# Altium PCB Small_BMS.PcbDoc
Units mil, origin at the board's own origin, x right, y up, seen from the top; angles counter-clockwise.
Board outline 1490 x 885 mil, 4 copper layers (Top Layer, Layer 1, Layer 2, Bottom Layer), stack 23.756 mil thick; 58 components, 45 nets, 233 pads, 19 vias.
Unrouted connection lines stored in the file: 3.
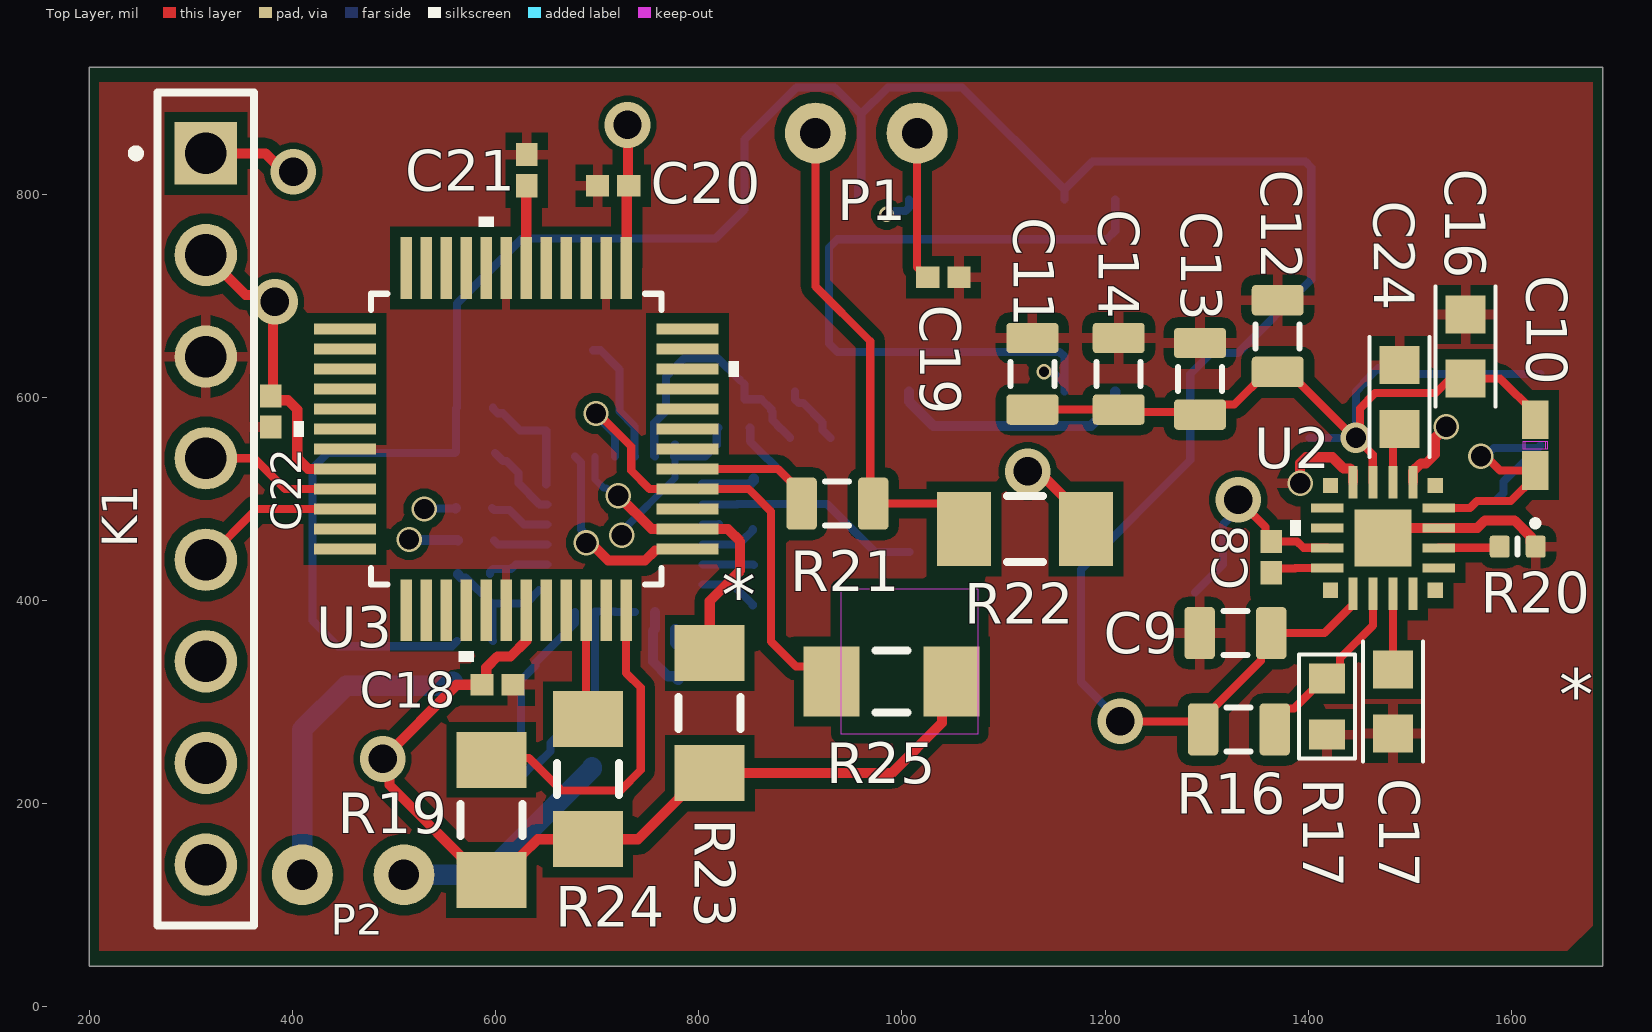
[diagram p0: Top Layer view]
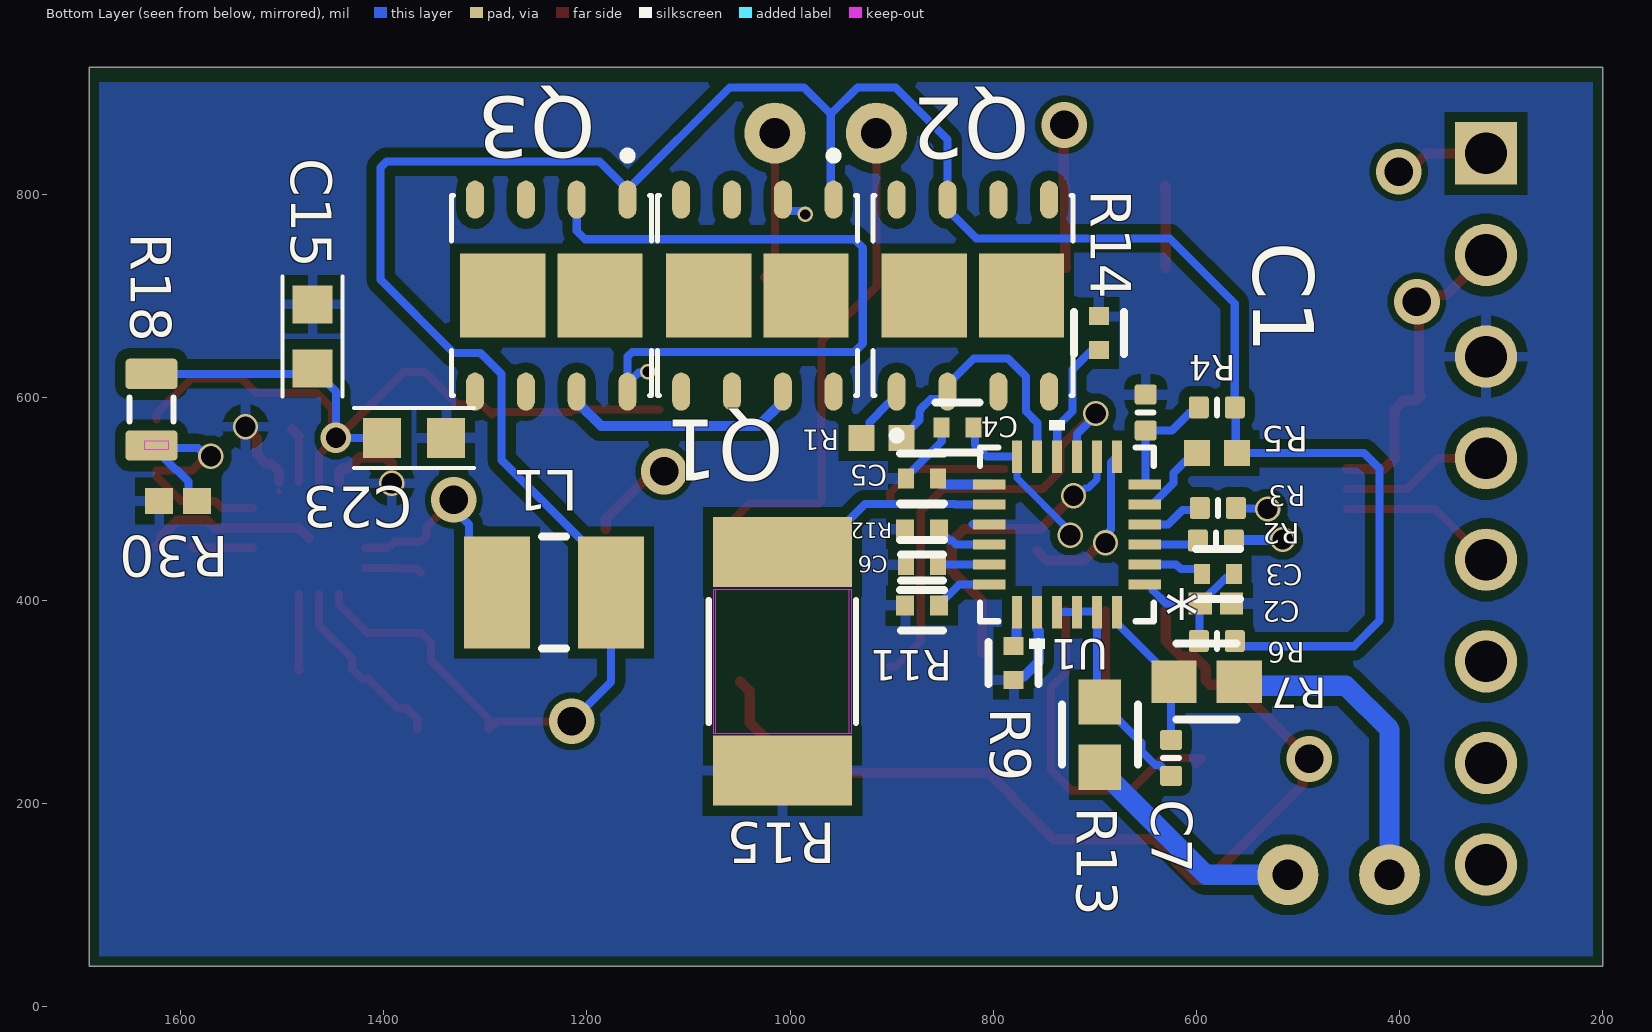
[diagram p1: Bottom Layer view, seen from below]
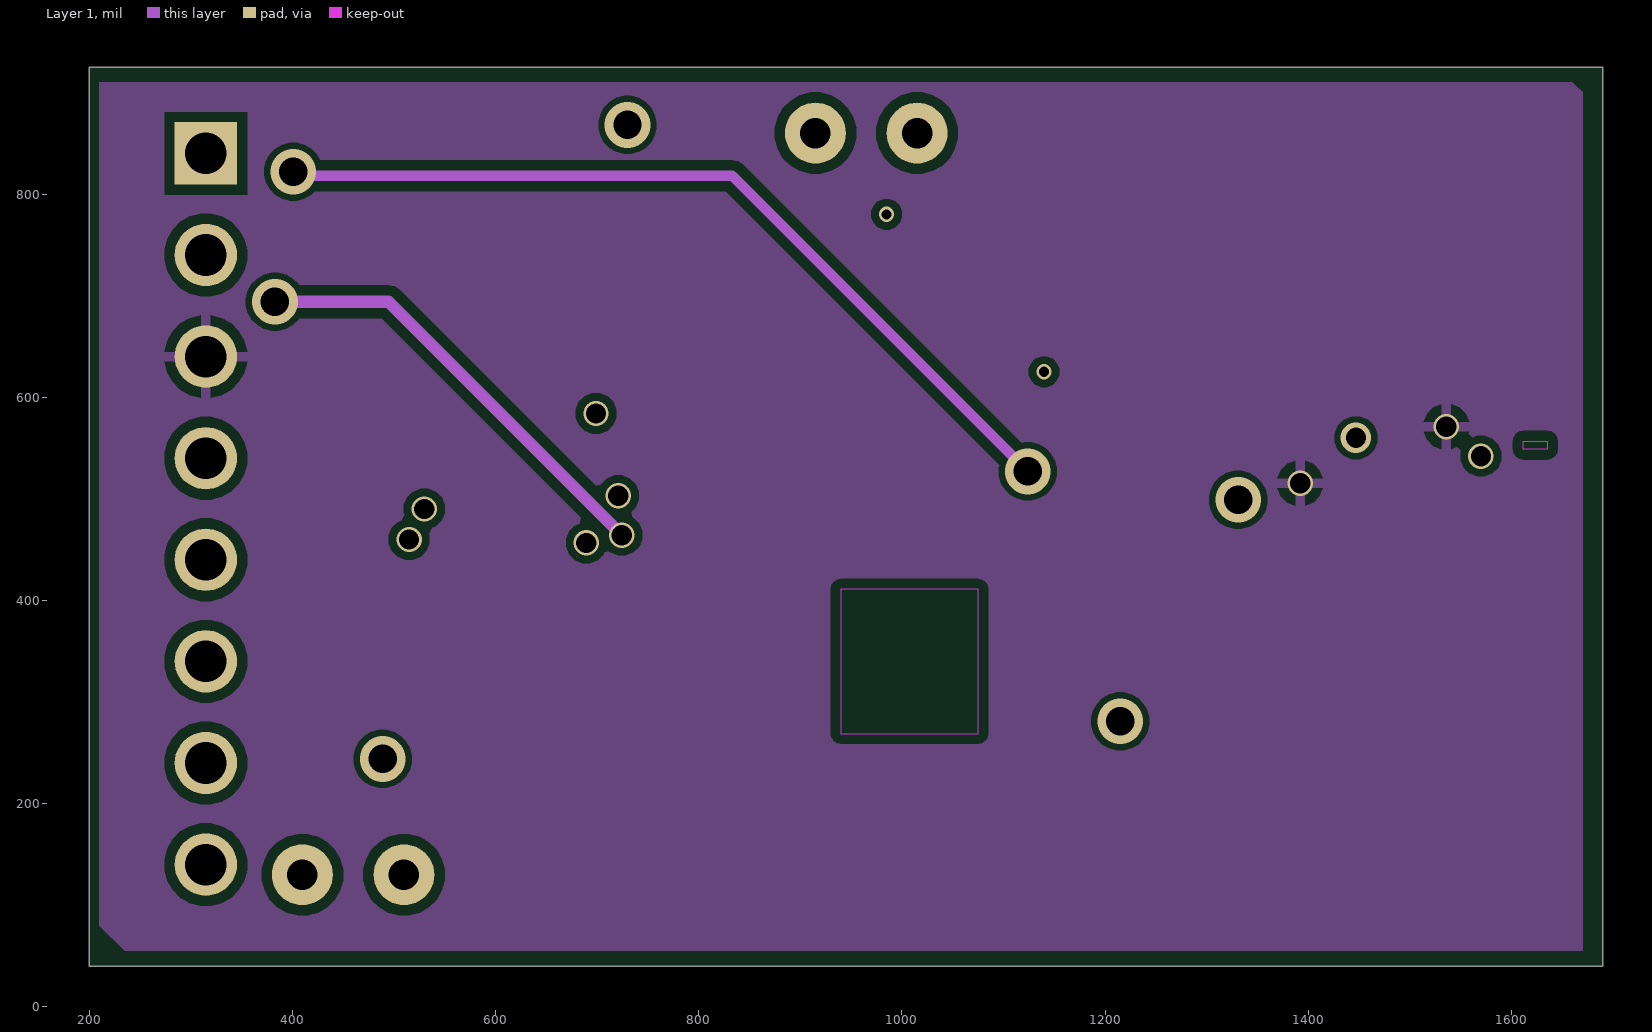
[diagram p2: Layer 1]
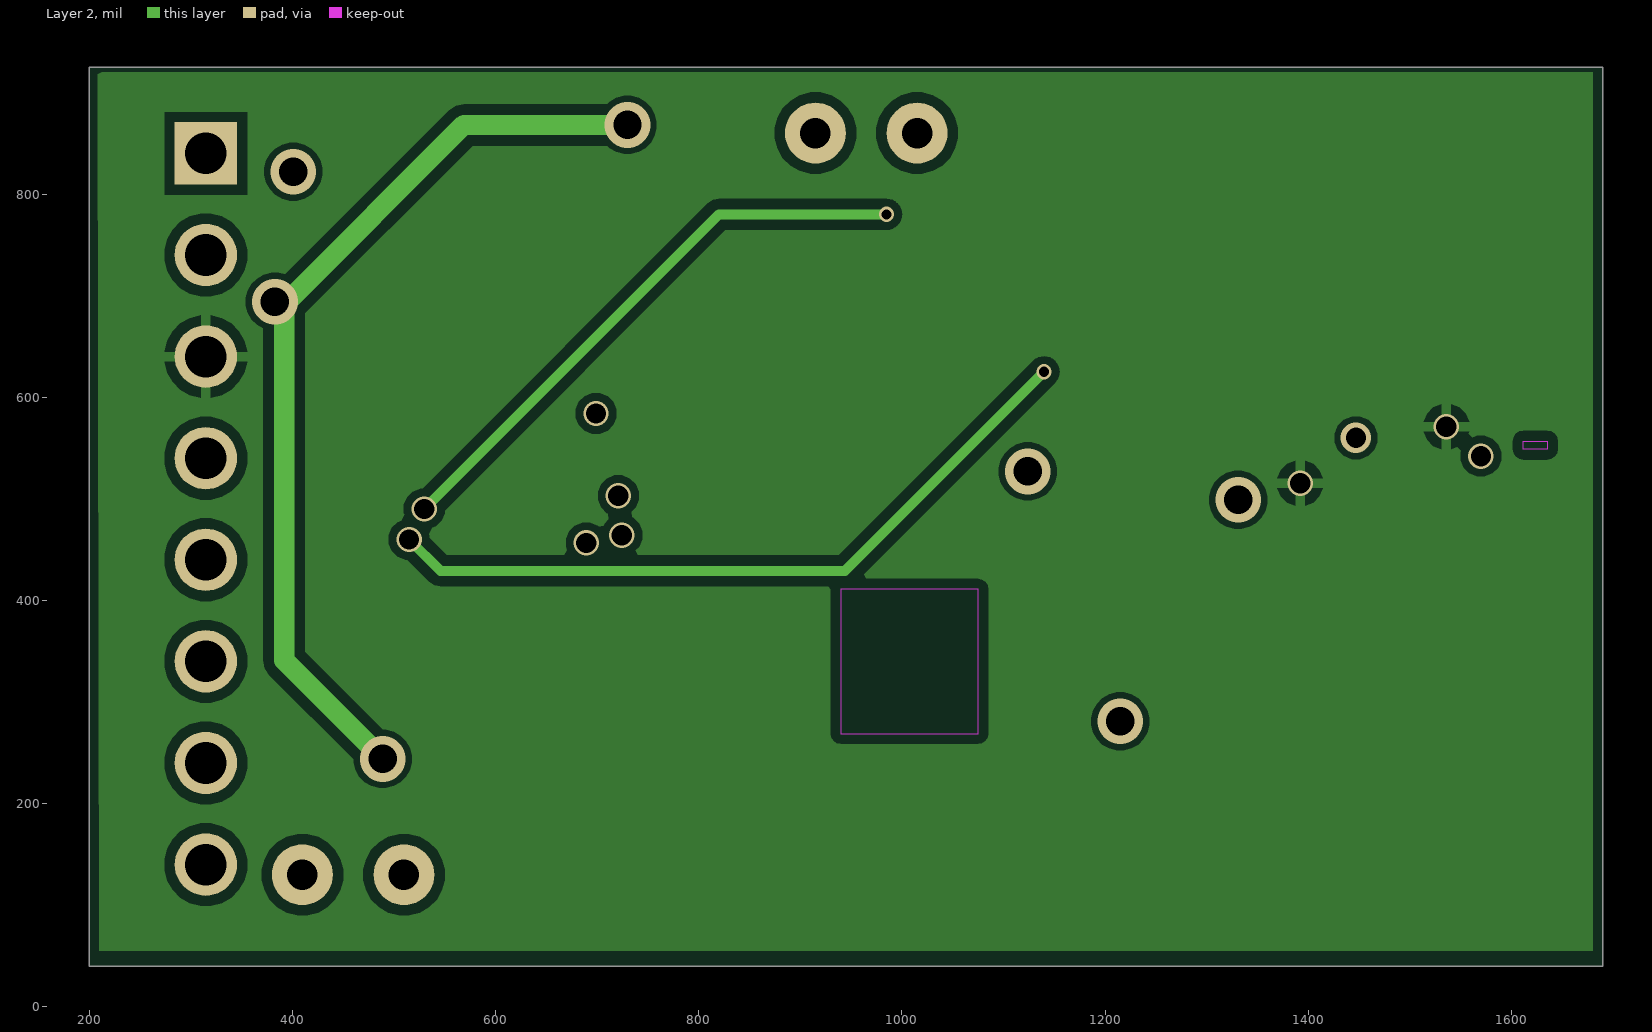
[diagram p3: Layer 2]
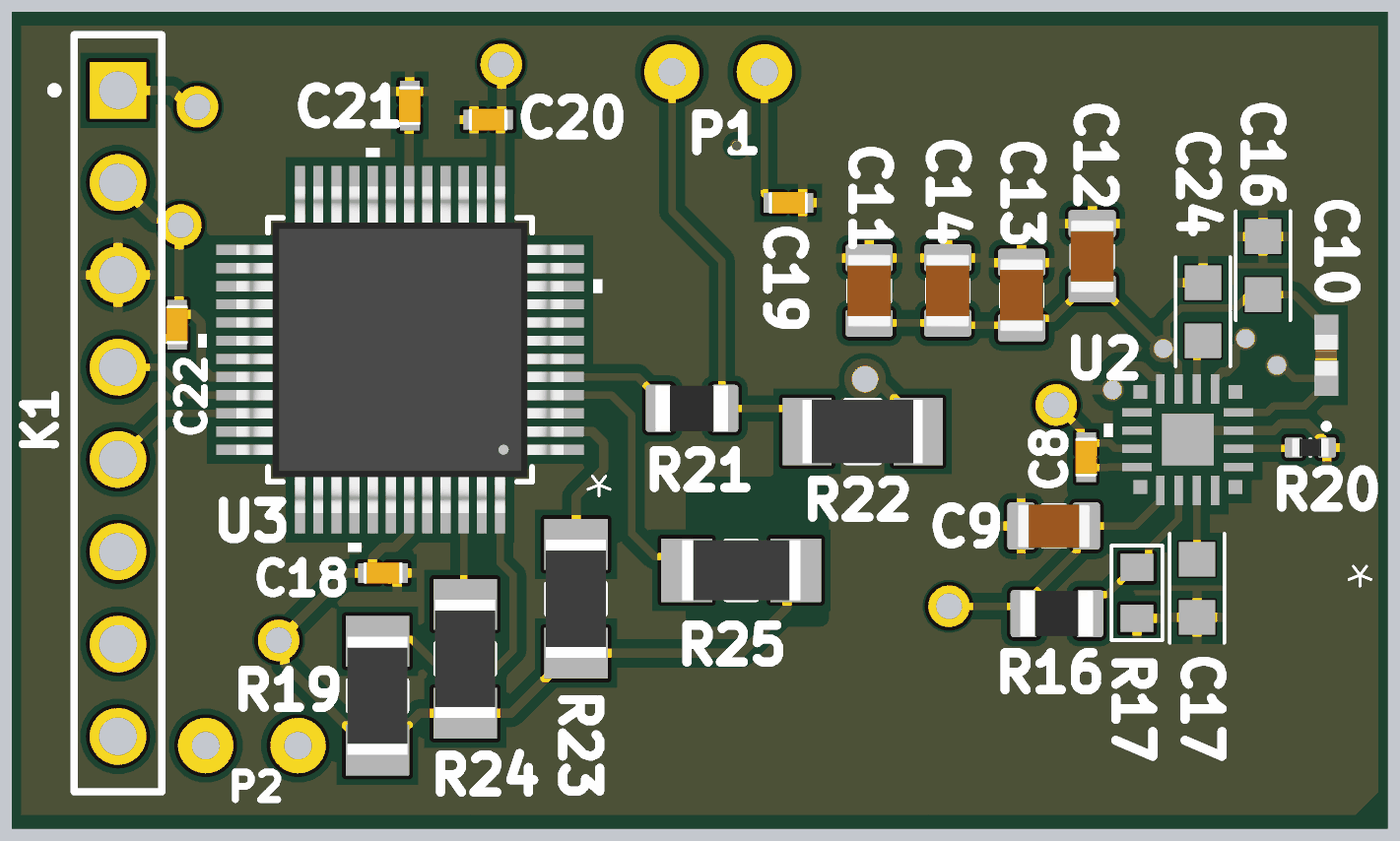
[diagram p4: 3D render of the assembled board from above, using the file's embedded part models]
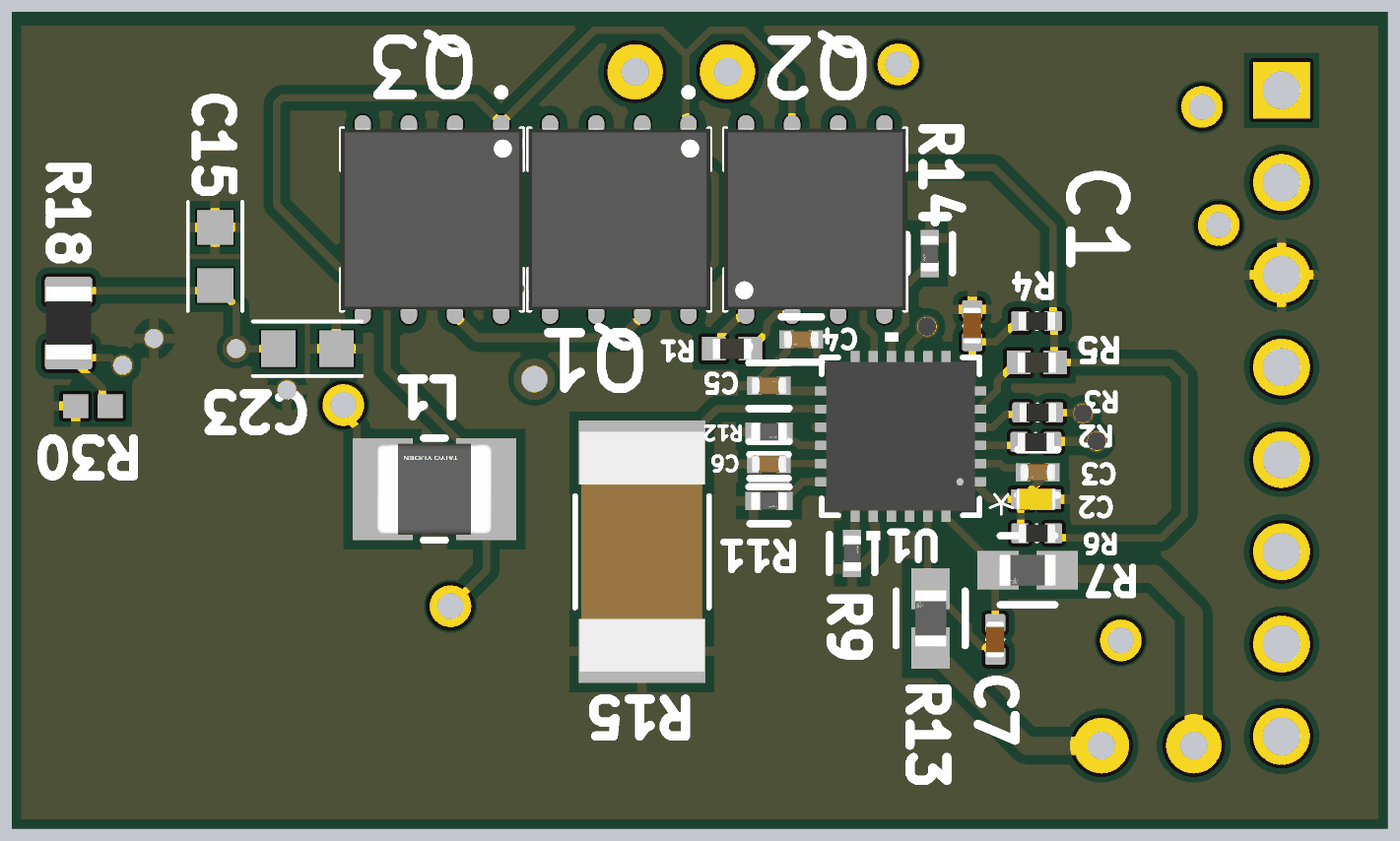
[diagram p5: 3D render of the assembled board from below, using the file's embedded part models]

## Layer stack, top to bottom
Top Solder: solder mask 0.4, Solder Resist, Dk 3.5
Top Layer: signal copper 1.4
Dielectric 2: prepreg 2.8, PP-006, Dk 4.1
Layer 1: signal copper 1.378
Dielectric 1: dielectric 12.6, FR-4, Dk 4.8
Layer 2: signal copper 1.378
Dielectric 3: prepreg 2.8, PP-006, Dk 4.1
Bottom Layer: signal copper 1.4
Bottom Solder: solder mask 0.4, Solder Resist, Dk 3.5

## Board outline
200,40 200,925 1690,925 1690,40

## Design rules (kind name [scope] priority, off if disabled: settings)
Clearance [All] p1: gap=10 ignorepadtopadclearanceinfootprint=FALSE except(6: Arc-Via Track-Via Via-Via Via-Fill Via-Poly Via-Region Via-Text Via-Hole)
PolygonConnect [All] p1: connectstyle=Relief reliefconductorwidth=10 reliefentries=4 polygonreliefangle="90 Angle" airgapwidth=10
RoomDefinition MCU [InComponentClass('MCU')] p1: confinementstyle=ConfineIn formatcopy=TRUE lockcomponents=FALSE outline 1240,865 160,865 160,35 1240,35
RoomDefinition MAX17320 [InComponentClass('MAX17320')] p2: confinementstyle=ConfineIn formatcopy=TRUE lockcomponents=FALSE outline 1530,905 505,905 505,110 1530,110
RoomDefinition BOOST [InComponentClass('BOOST')] p3: confinementstyle=ConfineIn formatcopy=TRUE lockcomponents=FALSE outline 1665,777.9 1048.5,777.9 1048.5,197.9 1665,197.9
RoutingVias [All] p1: holewidth=28 width=50 viastyle="Through Hole" minholewidth=28 minwidth=50 maxholewidth=28 maxwidth=50
SolderMaskExpansion [All] p1: expansion=4 istentingtop=FALSE
Width [All] p1: maxlimit=10 minlimit=10 preferedwidth=10
30 further rules are at their usual default settings.

## Classes and differential pairs
component class MCU: C18 C19 C20 C21 C22 P1 R19 R21 R22 R23 R24 R25 U3
component class MAX17320: C1 C2 C3 C4 C5 C6 C7 Q1 Q2 Q3 R1 R2 R3 R4 R5 R6 R7 R9 R11 R12 R13 R14 R15 U1
component class BOOST: C8 C9 C10 C11 C12 C13 C14 C15 C16 C17 C23 C24 L1 R16 R17 R18 R20 R30 U2
component class BMS: K1 P2

## Components (designator, comment, footprint, x,y, rotation, side; value= is the part's Value field where it differs from the comment)
C1 "Capacitor 10nF +/-20% 50V 0402" CAPC0402(1005)60_L 650,585 r270 bottom value=10nF
C2 "GRM155R61A474KE15D" FP-GRM15-0_1-MFG 579,426 r0 bottom value=0.47uF
C3 "Capacitor 0.1 uF +/- 5% 16 V 0402" CAPC1005X56X25LL10T15 581,397 r0 bottom value=100nF
C4 "GRM155R61A474KE15D" FP-GRM15-0_1-MFG 835,570 r0 bottom value=0.47uF
C5 "GRM155R61A474KE15D" FP-GRM15-0_1-MFG 870,520 r180 bottom value=0.47uF
C6 "GRM155R61A474KE15D" FP-GRM15-0_1-MFG 870,435 r180 bottom value=0.47uF
C7 "Capacitor 10nF +/-20% 50V 0402" CAPC0402(1005)60_L 625,245 r90 bottom value=10nF
C8 "Capacitor 0.1 uF +/- 5% 16 V 0402" CAPC1005X56X25LL10T15 1363.5,442.55 r90 top value=100nF
C9 "Capacitor 22µF +/-40% 16V 0805" CAPC0805(2012)145_L 1328.5,367.9 r0 top value=22µF
C10 "600L4R7BT200T4K" 600L4R7BT200T4K-Footprint-1 1623.5,552.9 r90 top
C11 "Capacitor 22µF +/-40% 16V 0805" CAPC0805(2012)145_L 1128.5,622.9 r270 top value=22µF
C12 "Capacitor 22µF +/-40% 16V 0805" CAPC0805(2012)145_L 1370,660 r270 top value=22µF
C13 "Capacitor 22µF +/-40% 16V 0805" CAPC0805(2012)145_L 1293.5,617.9 r270 top value=22µF
C14 "Capacitor 22µF +/-40% 16V 0805" CAPC0805(2012)145_L 1213.5,622.9 r270 top value=22µF
C15 "25V 1uF 0603 CAP" "25V 1uF 0603 CAP-Footprint-1" 1469.84,660 r270 bottom
C16 "25V 1uF 0603 CAP" "25V 1uF 0603 CAP-Footprint-1" 1555,650 r270 top
C17 "25V 1uF 0603 CAP" "25V 1uF 0603 CAP-Footprint-1" 1483.5,300.5 r90 top
C18 "Capacitor 0.1 uF +/- 5% 16 V 0402" CAPC1005X56X25LL10T15 602,317 r0 top value=100nF
C19 "Capacitor 0.1 uF +/- 5% 16 V 0402" CAPC1005X56X25LL10T15 1040.94,718.11 r180 top value=100nF
C20 "Capacitor 0.1 uF +/- 5% 16 V 0402" CAPC1005X56X25LL10T15 715.94,808.11 r0 top value=100nF
C21 "Capacitor 0.1 uF +/- 5% 16 V 0402" CAPC1005X56X25LL10T15 630.94,823.46 r270 top value=100nF
C22 "Capacitor 0.1 uF +/- 5% 16 V 0402" CAPC1005X56X25LL10T15 379,586 r270 top value=100nF
C23 "25V 1uF 0603 CAP" "25V 1uF 0603 CAP-Footprint-1" 1370,560 r0 bottom
C24 "25V 1uF 0603 CAP" "25V 1uF 0603 CAP-Footprint-1" 1490,600 r270 top
K1 "PICKIT 5 connector" "8 pin connector-Footprint-1" 315,490 r270 top
L1 "LBC3225T1R5MR" FP-LB3225-2_5-0_2-IPC_A 1232.36,407.9 r0 bottom value="1.5 uH"
P1 "2 pin header" "2 pin header-Footprint-1" 1015,860 r180 top
P2 "2 pin header" "2 pin header-Footprint-1" 510,130 r180 top
Q1 "DN2625DK6-G-ND" DN2625DK6-G-ND-Footprint-1 1032.17,700 r270 bottom
Q2 "DN2625DK6-G-ND" DN2625DK6-G-ND-Footprint-1 820,700 r90 bottom
Q3 "DN2625DK6-G-ND" DN2625DK6-G-ND-Footprint-1 1235,700 r270 bottom
R1 "Resistor 10k +/-1% 0402 100 mW" RESC1005X40X25ML05T05 910,560 r180 bottom value=10k
R2 "100R2F" RESC0402(1005)_L 581,459 r180 bottom value="100 ohm"
R3 "100R2F" RESC0402(1005)_L 579,491 r180 bottom value="100 ohm"
R4 "1KR2J" RESC0402(1005)_L 580,590 r180 bottom value="1k ohm"
R5 "Resistor 10k +/-1% 0402 100 mW" RESC1005X40X25ML05T05 580,545 r180 bottom value=10k
R6 "10R2F" RESC0402(1005)_L 580,360 r0 bottom value="10 ohm"
R7 "CRCW060350R0FKEA" FP-CRCW0603-e3-IPC_A 590,320 r0 bottom value="50 ohm"
R9 "10 KOHM" FP-NCP15-NCU15-0_05-MFG 780,338.27 r90 bottom value=10kR
R11 "10 KOHM" FP-NCP15-NCU15-0_05-MFG 870,395 r180 bottom value=10kR
R12 "10 KOHM" FP-NCP15-NCU15-0_05-MFG 870,470 r180 bottom value=10kR
R13 "CRCW060350R0FKEA" FP-CRCW0603-e3-IPC_A 695,267.9 r90 bottom value="50 ohm"
R14 "10 KOHM" FP-NCP15-NCU15-0_05-MFG 696,663 r270 bottom value=10kR
R15 "PA2512FKF7W0R005E" PA2512FKF7W0R005E-Footprint-1 1007.5,340 r90 bottom
R16 "1KR5J" RESC0805(2012)_L 1331.57,273 r180 top value=1k
R17 "RMCF0603FT287K" RMCF0603FT287K-Footprint-1 1418.5,295.46 r90 top
R18 "1KR5J" RESC0805(2012)_L 1628.5,587.9 r90 bottom value=1k
R19 "Resistor 4k7 +/-1% 1206 250 mW" RESC3116X70X50ML13T20 595.94,184.06 r270 top value=4.7k
R20 "47D5KR2F" RESC0402(1005)_L 1606.22,452.9 r180 top value=47.5k
R21 "Resistor 470R +/-5% 0805 125 mW" RESC0805(2012)_L 936.39,495.33 r180 top value=470
R22 "Resistor 10k +/-1% 1206 250 mW" RESC3216X60X45ML15T20 1121.39,470.33 r180 top value=10k
R23 "Resistor 4k7 +/-1% 1206 250 mW" RESC3116X70X50ML13T20 810.94,289.06 r270 top value=4.7k
R24 "Resistor 4k7 +/-1% 1206 250 mW" RESC3116X70X50ML13T20 690.94,224.06 r270 top value=4.7k
R25 "Resistor 4k7 +/-1% 1206 250 mW" RESC3116X70X50ML13T20 990,320 r0 top value=4.7k
R30 "RC0402FR-0790K9L" RESC1005X40X25ML05T10 1602.2,497.9 r180 bottom
U1 "MAX17320G20+" MAX17320G12+-FOOTPRINT-1 727.5,465 r0 bottom
U2 "LT8337EV-1#PBF" LT8337EV-1#PBF-Footprint-1 1473.5,461.5 r180 top
U3 "dsPIC33CK64MP105" dsPIC33CK64MP105-Footprint-1 620.42,558.83 r180 top

## Footprints (in the part's own frame and the unit in brackets; to place one, negate y for a bottom-side part, rotate by r counter-clockwise, add the part's x,y. Pads: shape width x height; smd on the part's side, far side on the other; paste and mask are expansions set on the pad)
"2 pin header-Footprint-1" [mil]
  round 60 hole 30: 1(0,0) 2(100,0)
"8 pin connector-Footprint-1" [mm]
  rect 1.56x1.56 hole 1.04: 01(-8.89,0)
  round 1.56 hole 1.04: 02(-6.35,0) 03(-3.81,0) 04(-1.27,0) 05(1.27,0) 06(3.81,0) 07(6.35,0) 08(8.89,0)
  silkscreen extent -10.42,-1.85 10.42,1.2
"25V 1uF 0603 CAP-Footprint-1" [mm]
  rect 0.95x1 smd mask+0.051: 1(-0.8,0) 2(0.8,0)
  silkscreen extent -1.5,-0.75 1.5,0.75
600L4R7BT200T4K-Footprint-1 [mil]
  rect 38x26 smd paste+0 mask+0: 1(-25,0) 2(25,0)
  Top Layer keep-out region: -4,-10 -4,10 4,10 4,-10
  Keep-Out Layer region: -4,-12 -4,12 4,12 4,-12
  silkscreen extent -80,-3 -74,3, body extent -22,-12 22,12, height 24
CAPC0402(1005)60_L [mm] "Chip Capacitor, Body 1.0x0.5mm, Height 0.6mm, IPC High Density"
  rrect25% 0.5x0.55 smd: 1(-0.45,0) 2(0.45,0)
  silkscreen extent 0,-0.2 0,0.2, body extent -0.5,-0.25 0.5,0.25, height 0.6
CAPC0805(2012)145_L [mm] "Chip Capacitor, Body 2.0x1.2mm, Height 1.45mm, IPC High Density"
  rrect25% 0.76x1.3 smd: 1(-0.9,0) 2(0.89,0)
  silkscreen extent -0.3,-0.55 0.3,0.55, body extent -1,-0.6 1,0.6, height 1.45
CAPC1005X56X25LL10T15 [mm] "Chip Capacitor, 2-Leads, Body 1.10x0.60mm, IPC High Density"
  rect 0.58x0.54 smd: 1(-0.39,0) 2(0.39,0)
  body extent -0.55,-0.3 0.55,0.3, height 0.56
DN2625DK6-G-ND-Footprint-1 [mm]
  oval 0.95x0.45 smd mask+0.05: 1(-2.4,1.905) 2(-2.4,0.635) 3(-2.4,-0.635) 4(-2.4,-1.905) 5(2.4,-1.905) 6(2.4,-0.635) 7(2.4,0.635) 8(2.4,1.905)
  rect 2.1x2.13 smd paste-2 mask+0.05: D1(0,1.215) D2(0,-1.215)
  silkscreen extent -3.6,-2.5 2.5,2.5, body extent -2.5,-2.5 2.5,2.5, height 0.9
dsPIC33CK64MP105-Footprint-1 [mil]
  rect 61x11 smd paste+0 mask+0: 1(-168.5,108.27) 2(-168.5,88.58) 3(-168.5,68.9) 4(-168.5,49.21) 5(-168.5,29.53) 6(-168.5,9.84) 7(-168.5,-9.84) 8(-168.5,-29.53) 9(-168.5,-49.21) 10(-168.5,-68.9) 11(-168.5,-88.58) 12(-168.5,-108.27) 25(168.5,-108.27) 26(168.5,-88.58) 27(168.5,-68.9) 28(168.5,-49.21) 29(168.5,-29.53) 30(168.5,-9.84) 31(168.5,9.84) 32(168.5,29.53) 33(168.5,49.21) 34(168.5,68.9) 35(168.5,88.58) 36(168.5,108.27)
  rect 11x61 smd paste+0 mask+0: 13(-108.27,-168.5) 14(-88.58,-168.5) 15(-68.9,-168.5) 16(-49.21,-168.5) 17(-29.53,-168.5) 18(-9.84,-168.5) 19(9.84,-168.5) 20(29.53,-168.5) 21(49.21,-168.5) 22(68.9,-168.5) 23(88.58,-168.5) 24(108.27,-168.5) 37(108.27,168.5) 38(88.58,168.5) 39(68.9,168.5) 40(49.21,168.5) 41(29.53,168.5) 42(9.84,168.5) 43(-9.84,168.5) 44(-29.53,168.5) 45(-49.21,168.5) 46(-68.9,168.5) 47(-88.58,168.5) 48(-108.27,168.5)
  silkscreen extent -219,-219 219,219, body extent -177,-177 177,177, height 47
FP-CRCW0603-e3-IPC_A [mil]
  rect 44.69x41.82 smd paste+0 mask+0: 1(-32.1,0) 2(32.1,0)
  silkscreen extent -30,-37 30,37, body extent -31,-17 31,17, height 20
FP-GRM15-0_1-MFG [mm]
  rect 0.4x0.5 smd paste+0 mask+0: 1(-0.4,0) 2(0.4,0)
  silkscreen extent -0.55,-0.63 0.55,0.63, body extent -0.5,-0.25 0.5,0.25, height 0.55
FP-LB3225-2_5-0_2-IPC_A [mil]
  rect 65.14x110.48 smd paste+0 mask+0: 1(-56.14,0) 2(56.14,0)
  silkscreen extent -12,-55 12,55, body extent -63,-49 63,49, height 106
FP-NCP15-NCU15-0_05-MFG [mm]
  rect 0.45x0.5 smd paste+0 mask+0: 1(-0.425,0) 2(0.425,0)
  silkscreen extent -0.53,-0.63 0.53,0.63, body extent -0.5,-0.25 0.5,0.25, height 0.55
LT8337EV-1#PBF-Footprint-1 [mil]
  rect 32x9 smd paste+0 mask+0: 1(-55,29.53) 2(-55,9.84) 3(-55,-9.84) 4(-55,-29.53) 9(55,-29.53) 10(55,-9.84) 11(55,9.84) 12(55,29.53)
  rect 9x32 smd paste+0 mask+0: 5(-29.53,-55) 6(-9.84,-55) 7(9.84,-55) 8(29.53,-55) 13(29.53,55) 14(9.84,55) 15(-9.84,55) 16(-29.53,55)
  rect 56x56 smd paste+0 mask+0: 17(0,0)
  rect 15x15 smd paste+0 mask+0: 18(-51.5,51.5) 19(-51.5,-51.5) 20(51.5,-51.5) 21(51.5,51.5)
  silkscreen extent 81,-17 91,-2
MAX17320G12+-FOOTPRINT-1 [mil] "TFQN Packaging"
  rect 32x10 smd paste+0 mask+0: 1(-76.5,49.21) 2(-76.5,29.53) 3(-76.5,9.84) 4(-76.5,-9.84) 5(-76.5,-29.53) 6(-76.5,-49.21) 13(76.5,-49.21) 14(76.5,-29.53) 15(76.5,-9.84) 16(76.5,9.84) 17(76.5,29.53) 18(76.5,49.21)
  rect 10x32 smd paste+0 mask+0: 7(-49.21,-76.5) 8(-29.53,-76.5) 9(-9.84,-76.5) 10(9.84,-76.5) 11(29.53,-76.5) 12(49.21,-76.5) 19(49.21,76.5) 20(29.53,76.5) 21(9.84,76.5) 22(-9.84,76.5) 23(-29.53,76.5) 24(-49.21,76.5)
  silkscreen extent -86,-112 86,112, body extent -81,-81 81,81, height 32
PA2512FKF7W0R005E-Footprint-1 [mil]
  rect 69x137 smd paste+0 mask+0: 1(-107.5,0) 2(107.5,0)
  Top Layer keep-out region: -71,-65.5 -71,65.5 71,65.5 71,-65.5
  Keep-Out Layer region: -71,-67.5 -71,67.5 71,67.5 71,-67.5
  silkscreen extent -61,-72 61,72, body extent -130,-67 130,67, height 35
RESC0402(1005)_L [mm] "Chip Resistor, Body 1.0x0.5mm, IPC High Density"
  rrect25% 0.5x0.55 smd: 1(-0.45,0) 2(0.45,0)
  silkscreen extent 0,-0.2 0,0.2, body extent -0.5,-0.25 0.5,0.25, height 0.3
RESC0805(2012)_L [mm] "Chip Resistor, Body 2.0x1.3mm, IPC High Density"
  rrect25% 0.76x1.3 smd: 1(-0.9,0) 2(0.89,0)
  silkscreen extent -0.3,-0.55 0.3,0.55, body extent -1,-0.62 1,0.63, height 0.6
RESC1005X40X25ML05T05 [mm] "Chip Resistor, 2-Leads, Body 1.05x0.55mm, IPC Low Density"
  rect 0.65x0.65 smd: 1(-0.5,0) 2(0.5,0)
  body extent -0.53,-0.28 0.53,0.28, height 0.4
RESC1005X40X25ML05T10 [mm] "Chip Resistor, 2-Leads, Body 1.00x0.50mm, IPC Low Density"
  rect 0.7x0.65 smd: 1(-0.475,0) 2(0.475,0)
  body extent -0.53,-0.27 0.53,0.28, height 0.4
RESC3116X70X50ML13T20 [mm] "Chip Resistor, 2-Leads, Body 3.25x1.65mm, IPC Low Density"
  rect 1.4x1.75 smd: 1(-1.5,0) 2(1.5,0)
  silkscreen extent -0.4,-0.77 0.4,0.77, body extent -1.63,-0.82 1.63,0.82, height 0.7
RESC3216X60X45ML15T20 [mm] "Chip Resistor, 2-Leads, Body 3.3x1.75mm, IPC Low Density"
  rect 1.35x1.85 smd: 1(-1.525,0) 2(1.525,0)
  silkscreen extent -0.45,-0.82 0.45,0.82, body extent -1.65,-0.87 1.65,0.87, height 0.6
RMCF0603FT287K-Footprint-1 [mm]
  rect 0.75x0.9 smd: 1(-0.7,0) 2(0.7,0)
  silkscreen extent -1.3,-0.7 1.3,0.7

## Part data
C1 C7: library part CMP-001-00069-3, "Chip Capacitor, 10nF +/-20%, 50V, 0402, Thickness 0.6 mm", Case/Package=0402, Max Operating Temperature=85°C, Min Operating Temperature=-55°C, Tolerance=5%, Voltage Rating=50V, Mounting Technology=SMT, Pins=2
C2 C4 C5 C6: library part CMP-001-00087-7, "Multilayer Ceramic Capacitor, 0.47 uF, 10 V, ± 10%, X5R, 0402 [1005 Metric]"
C3 C8 C18 C19 C20 C21 C22: library part CMP-001-00001-6, "Chip Capacitor, 0.1 uF, +/- 5%, 16 V, 0402 (1005 Metric)", Capacitor Type=Ceramic, Case/Package=0402, Max Operating Temperature=125°C, Min Operating Temperature=-55°C, Tolerance=5%, Voltage Rating=16V, Mounting Technology=SM, Pins=2, RoHS Compliant=True
C9 C11 C12 C13 C14: library part CMP-001-00081-4, "Chip Capacitor, 22µF +/-40%, 16V, 0805, Thickness 1.45 mm", Case/Package=0805, Max Operating Temperature=85°C, Min Operating Temperature=-55°C, Tolerance=5%, Voltage Rating=16V, Mounting Technology=SMT, Pins=2
C10: library part CMP-001-00089-1, "Cap Cer 4.7PF 200V C0G/NP0 0402", Parameter 1=4.7pF
C15 C16 C17 C23 C24: library part CMP-001-00085-1, "0603 1 uF 25 V ±10 % Tolerance X5R SMT Multilayer Ceramic Capacitor", Parameter 1=1uF
K1: library part CMP-002-00072-1
L1: library part CMP-006-00023-2, "1.5 uH"
P1 P2: library part CMP-00014-2
Q1 Q2 Q3: library part CMP-013-00035-4, "MOSFET 2N-CH 250V 1.1A 8DFN"
R1 R5: library part CMP-009-00015-5, "Chip Resistor, 10 KOhm, +/- 1%, 0.1 W, -55 to 155 degC, 0402 (1005 Metric)", Case/Package=0402, Max Operating Temperature=155°C, Min Operating Temperature=-55°C, Power=100mW, Tolerance=1%, Voltage Rating=50V, Mounting Technology=SM, Pins=2, RoHS Compliant=True
R2 R3: library part CMP-009-00065-2, "100R 0.063W 1% 0402 (1005 Metric)  SMD", Case/Package=0402, Power=63mW, Tolerance=1%, Mounting Technology=SMT, Pins=2
R4: library part CMP-009-00075-2, "1K 0.063W 5% 0402 (1005 Metric)  SMD", Case/Package=0402, Power=63mW, Tolerance=5%, Mounting Technology=SMT, Pins=2
R6: library part CMP-009-00067-2, "10R 0.063W 1% 0402 (1005 Metric)  SMD", Case/Package=0402, Power=63mW, Tolerance=1%, Mounting Technology=SMT, Pins=2
R7 R13: library part CMP-009-00186-1, "SMD Chip Resistor, 50 Ohm, ± 1%, 100 mW, 0603 [1608 Metric], Thick Film, General Purpose"
R9 R11 R12 R14: library part CMP-00013-1, "Ntc Thermistor, Aec-Q200, 10Kohm, 0402 Rohs Compliant: Yes", Case/Package=0402, Max Current Rating=100uA, Max Operating Temperature=125°C, Min Operating Temperature=-40°C, Tolerance=1%, Voltage Rating=5V, Height=550um, RoHS Compliant=Yes
R15: library part CMP-009-00189-1, "Res Thin Film 2512 5m Ohm 1% 2W ±100ppm/°C Molded SMD Embossed T/R", Parameter 1="5 mohm"
R16 R18: library part CMP-009-00076-2, "1K 0.125W 5% 0805 (2012 Metric)  SMD", Case/Package=0805, Power=125mW, Tolerance=5%, Mounting Technology=SMT, Pins=2
R17: library part CMP-009-00178-3, "Res Thick Film 0603 287K Ohm 1% 1/10W ±100ppm/°C Molded SMD SMD Paper T/R", Case Code (Imperial)=0603, Case Code (Metric)=1608, Case/Package=0603, Contact Plating=Tin,Matte, Parameter 1="287 kohm"
R19 R23 R24 R25: library part CMP-009-00033-5, "Chip Resistor, 4.7 KOhm, +/- 1%, 0.25 W, -55 to 155 degC, 1206 (3216 Metric)", Case/Package=1206, Max Operating Temperature=155°C, Min Operating Temperature=-55°C, Power=250mW, Tolerance=1%, Voltage Rating=200V, Mounting Technology=SM, Pins=2, RoHS Compliant=True
R20: library part CMP-009-00103-2, "47K5 0.063W 1% 0402 (1005 Metric)  SMD", Case/Package=0402, Power=63mW, Tolerance=1%, Mounting Technology=SMT, Pins=2
R21: library part CMP-009-00122-3, "Chip Resistor, 470 Ohms, +/-5%, 125 mW, -55 to 155 degC, 0805", Case/Package=0805, Max Operating Temperature=155°C, Min Operating Temperature=-55°C, Power=125mW, Tolerance=5%, Pins=2
R22: library part CMP-009-00016-5, "Chip Resistor, 10 KOhm, +/- 1%, 0.25 W, -55 to 155 degC, 1206 (3216 Metric)", Case/Package=1206, Max Operating Temperature=155°C, Min Operating Temperature=-55°C, Power=250mW, Tolerance=1%, Voltage Rating=200V, Mounting Technology=SM, Pins=2, RoHS Compliant=True
R30: library part CMP-009-00188-1, "SMD Chip Resistor, 90.9 kOhm, ± 1%, 63 mW, 0402 [1005 Metric], Thick Film, General Purpose", Parameter 1="90.9 kohm"
U1: library part CMP-00012-2, "Fuel Gauge 2S-4S ModelGauge m5 EZ with Protector I2C 4.2V to 18V 24-Pin TQFN"
U2: library part CMP-001-0000-4, "Conv DC-DC 2.7V to 28V Synchronous Step Up Single-Out 2.7V to 28V 5A 16-Pin LQFN EP Tray"
U3: library part CMP-001-0001-1, "16-bit MCU/DSC, 64 KB, 8192 Bytes, 100 MHz, 3 to 3.6V, TQFP-48, RoHS"

## Via types
v1: diameter 25, hole 20, Top Layer to Bottom Layer, tented both sides, 9 vias
v2: diameter 45, hole 28, Top Layer to Bottom Layer, 6 vias
v3: diameter 15, hole 10, Top Layer to Bottom Layer, tented both sides, 2 vias
v4: diameter 30, hole 20, Top Layer to Bottom Layer, tented both sides, 1 vias
v5: diameter 45, hole 28, Top Layer to Bottom Layer, tented both sides, 1 vias

## Nets (pads, with @x,y where several pads share a name; then routed paths per layer and width w, separated by ;. In a path a pad name is that pad's centre, name@x,y a point inside that pad or via, vN(x,y) a via of type N, cw(c..) or ccw(c..) an arc to the next point about the centre after c; other vN are vias at no path point)
+5: C4.1 C18.1 C20.2 C22.1 K1.02 R19.2 R23.2 R24.2 R25.2 U1.12 U3.13 U3.32 U3.43 | length 2910.2
  Top Layer w10: K1.02 354.3,700.7 376.3,700.7 v2(383,694) 381,692 381,603.35 C22.1 383.29,597.06 395.84,597.06 405,587.91 405,540 415.7,529.3 U3.32 ; U3.43 630.26,360.26 614.83,344.83 601.92,344.83 590.94,333.84 590.94,321.29 C18.1 562,317 v2(489,244) 495.7,237.3 495.7,218.36 589.06,125 R19.2 602.83,125 625.39,147.56 625.39,148.9 641.5,165 R24.2 740.39,165 781.5,206.1 781.5,207.44 804.06,230 R23.2 990,230 1039.61,279.61 1039.61,310.55 R25.2 ; U3.13 729.19,727.83 729.19,807.3 730.65,808.76 730.65,867.35 v2(730,868)
  Layer 1 w12: v2(383,694) 494.64,694 v1(724.37,464.28)
  Layer 2 w20: v2(489,244) 392,341 392,691 569,868 v2(730,868)
  Bottom Layer w7: v1(724.37,464.28) 724.37,468.04 776.71,520.39 U1.12
  Bottom Layer w8: U1.12 806.5,541.5 817.84,552.84 817.84,568.59 C4.1
  Bottom Layer w10: U1.12 U1.12@776.71,552.5
"+ Latte Panda Terminal": C10.2 C11.2 C12.2 C13.2 C14.2 C15.2 C16.2 C23.2 R18.2 U2.7 | length 936.1
  Top Layer w8: C11.2 C14.2 1216,585.36 1291,585.36 C13.2 1303.46,592.82 1327.23,592.82 1359.37,624.96 C12.2 1380.63,624.96 1445.59,560 v4(1447,560) ; U2.7 1463.47,516.69 1463.47,543.53 v4(1447,560) ; C10.2 1623.5,583.9 1588.9,618.5 1540,618.5 1525.5,604 1465.9,604 1450.83,588.93 1450.83,563.83 v4(1447,560)
  Bottom Layer w8: C23.2 v4(1447,560) 1447,605.66 1455.16,613.82 1455.16,614.8 1468.86,628.5 C15.2 1475.41,622.94 R18.2
GND: C1.1 C3.1 C4.2 C5.1 C6.1 C9.1 C11.1 C12.1 C13.1 C14.1 C15.1 C16.1 C17.1 C18.2 C19.1 C20.1 C21.1 C22.2 C23.1 C24.1 K1.03 R9.1 R11.1 R12.1 R14.1 R15.1 R17.1 R20.1 R30.1 U1.15 U1.20 U2.3 U2.5 U2.8 U2.17 U3.14 U3.19 U3.31 U3.42 | length 495.9
  Top Layer w6: U2.5@1502.84,507.08 U2.5@1503.03,507.27
  Top Layer w10: v1(1392,515.43) 1392,535.14 1397.86,541 1423.57,541 1434.57,530 1440.97,530 1443.97,527 U2.8 ; U2.17 1483.34,471.34 U2.3 1566.5,471.34 1573.89,478.73 1603.11,478.73 1619.09,462.75 1619.09,457.74 R20.1 ; U2.5 1503.03,527 1510.83,534.8 1515.9,534.8 1524.69,543.59 1524.69,559.69 v1(1536,571)
  Bottom Layer w8: U1.15 819.84,474.84 820.16,475.16 ; C4.2@850,570 C4.2 850.75,556.61 C5.1@886.56,520.81
  Bottom Layer w10: U1.20 757.03,371.94 755.16,370.07 755.16,339.93 769.69,325.39 776.14,325.39 R9.1
"Latte Panada I2C": R19.1 U3.48 | length 340.3
  Top Layer w8: R19.1@594.06,245 633,245 665,213 723,213 743,233 743,314.28 728.69,328.59 U3.48 ; R19.1 R19.1@600.59,238.46
"Latte Panda I2C": R24.1 U3.46 | length 107.9
  Top Layer w8: R24.1@689.32,284.74 U3.46
  Top Layer w10: R24.1@689.32,284.74 R24.1
NetC1_2: C1.2 R4.1 U1.6 | length 115.3
  Bottom Layer w8: R4.1 597.72,589.02 602.56,584.17 607.32,584.17 624.21,567.28 C1.2 U1.6@650,514.21
NetC2_1: C2.1 C3.2 R6.2 U1.1 | length 135
  Bottom Layer w8: C2.1@566.13,422.63 570.72,422.63 C3.2 ; R6.2 597.04,360.68 597.04,396.32 C3.2 ; 643,410 630,397 C3.2
  Bottom Layer w10: C2.1 563.25,425.5 C2.1@566.13,422.63
NetC2_2: C2.2 U1.2 | length 61.3
  Bottom Layer w8: C2.2 594.75,427.97 597.62,430.84 615.37,430.84 620,435.47 U1.2
NetC5_2: C5.2 U1.13 | length 53.8
  Bottom Layer w10: U1.13 850.43,514.21 854.25,518.03 C5.2
NetC6_2: C6.2 U1.17 | length 50.4
  Bottom Layer w8: U1.17 853.78,435.47 C6.2
NetC7_1: C7.1 R13.2 U1.21 U1.22 U1.23 | length 235.2
  Bottom Layer w8: C7.1 625.98,227.28 636.57,237.87 640.6,237.87 654.24,251.51 654.24,259.5 677.4,282.66 679.09,282.66 695,298.56 R13.2 697.97,302.97 U1.23 ; U1.23@697.97,389 717.66,389 U1.22 U1.21
NetC7_2: C7.2 R7.2 U1.24 | length 151.1
  Bottom Layer w8: C7.2 625,317.1 R7.2 623.54,320 639.45,335.91 639.45,338.66 678.29,377.5 U1.24
NetC8_1: C8.1 U2.12 | length 57
  Top Layer w8: C8.1 1367.79,431.48 1387.01,431.48 1387.5,431.97 U2.12
NetC8_2: C8.2 L1.2 U2.11 | length 220.8
  Top Layer w8: v2(1331,499) 1357.87,472.13 1357.87,463.53 C8.2 1389.13,457.9 1395.19,451.84 1418.32,451.84 U2.11
  Bottom Layer w8: L1.2 1316.07,435.47 1316.07,474.6 1331,489.53 v2(1331,499)
NetC9_2: C9.2 L1.1 Q1.1 Q2.7 Q3.1 R4.2 R5.2 R6.1 R16.2 U2.13 | length 2722
  Top Layer w8: v2(1215,281) 1288.53,281 R16.2 1296.53,283.63 1353.58,340.68 1353.58,357.94 C9.2 1415.87,367.9 1443.97,396 U2.13
  Bottom Layer w8: R6.1 557.19,354.91 445.09,354.91 419.85,380.15 419.85,529.85 435,545 R5.2 561.3,545.98 561.3,589.02 R4.2 562.28,692.28 626.34,756.34 816.69,756.34 845,784.65 Q2.7 845,853.64 896.36,905 933.64,905 960,878.64 ; Q1.1 957.17,806.42 960,809.25 960,878.64 ; Q3.1 Q3.1@1160,804.33 ; v2(1215,281) 1176.23,319.77 L1.1 1176.23,430.57 1283.86,538.21 1283.86,622.95 1304.57,643.66 1330.98,643.66 1403,715.68 1403,826.14 1397.14,832 1187.67,832 Q3.1@1160,804.33 ; 960,878.64 986.36,905 1059.33,905 Q3.1@1160,804.33
NetC10_1: C10.1 R18.1 R30.2 U2.4 | length 306.6
  Top Layer w8: U2.4 1559.32,491.03 1566.02,497.73 1599.33,497.73 1623.5,521.9 C10.1 1623.4,528 1588.6,528 1574.6,542 v1(1570,542)
  Bottom Layer w8: v1(1570,542) 1574.6,542 1582.6,550 R18.1@1626.03,550 ; R30.2 1584.33,497.9 1592.12,505.7 1592.12,516.91 1603.58,528.37 1604.4,528.37 R18.1@1626.03,550 ; R18.1 R18.1@1626.03,550
NetC17_2: C17.2 U2.15 | length 74.6
  Top Layer w8: C17.2@1483.34,332.15 U2.15
  Top Layer w10: C17.2@1483.34,332.15 C17.2
NetC19_2: C19.2 P1.1 | length 146.7
  Top Layer w8: P1.1 1015,727.91 1024.8,718.11 C19.2
NetC21_2: C21.2 U3.18 | length 81.1
  Top Layer w10: U3.18 630.26,807.43 C21.2
NetC24_2: C24.2 U2.6 | length 54.8
  Top Layer w8: U2.6 C24.2@1483.34,561.85
  Top Layer w10: C24.2@1483.34,561.85 C24.2
NetK1_01: K1.01 R22.1 | length 1025.3
  Top Layer w10: K1.01 373.53,840 391.53,822 v2(401,822) ; v5(1124,527) 1130.7,520.3 1141.3,520.3 1181.42,480.17 R22.1
  Layer 1 w10: v2(401,822) 405,818 833,818 v5(1124,527)
NetK1_04: K1.04 U3.33 | length 149.5
  Top Layer w8: K1.04 362.48,540 392.86,509.62 U3.33
NetK1_05: K1.05 U3.34 | length 157.6
  Top Layer w8: K1.05 364.93,489.93 U3.34
NetP1_2: P1.2 R21.1 R22.2 | length 490.1
  Top Layer w8: P1.2 915,709 968.94,655.06 968.94,498.21 R21.1 1039.77,495.33 1061.35,473.76 R22.2
NetP2_1: P2.1 R13.1 | length 229.7
  Bottom Layer w20: P2.1 590.64,130 695,234.36 R13.1
NetP2_2: P2.2 R7.1 | length 310.4
  Bottom Layer w20: P2.2 410,273 453,316 553.9,316 R7.1
NetQ1_2: Q1.2 R3.2 | length 639.5
  Layer 2 w10: v1(530,490) 820,780 v3(985,780)
  Bottom Layer w8: v1@530.5,490.5 R3.2@560.78,490.5 ; v3(985,780) 986.35,780 989.52,783.17 1003.6,783.17 1007.17,786.73 Q1.2
  Bottom Layer w10: v1(530,490) v1@530.5,490.5 ; R3.2@560.78,490.5 R3.2
NetQ1_7: Q1.7 Q3.7 | length 242.3
  Bottom Layer w10: Q1.7 1007.17,595.67 1031.02,571.81 1186.14,571.81 1210,595.67 Q3.7
NetQ2_1: Q2.1 R1.1 | length 62.4
  Bottom Layer w8: Q2.1 895,597.76 898.56,594.19 902.93,594.19 921.89,575.23 921.89,567.8 R1.1
NetQ2_2: Q2.2 R1.2 U1.11 | length 266.7
  Bottom Layer w8: U1.11 756.34,542.19 756.34,574.69 767.86,586.2 767.86,620.54 785.53,638.21 819.2,638.21 840.2,617.21 840.51,617.21 845,612.72 Q2.2@845,599.24 ; Q2.2 845,598.05 861.67,598.05 871.45,588.27 871.45,586.89 872.62,585.72 872.62,577.41 881.24,568.8 881.52,568.8 890.03,560.28 R1.2@890.03,560
NetQ3_2: Q3.2 Q3.8 R2.2 | length 1477.4
  Layer 2 w10: v1(515,460) 545.89,429.11 944.11,429.11 v3(1140,625)
  Bottom Layer w8: v3(1140,625) 1140.96,624.04 1149.22,624.04 Q3.8@1160,613.27 ; Q3.8 Q3.8@1160,613.27 ; Q3.2 1210,763.79 1201.67,755.46 936.73,755.46 928.4,747.14 928.4,652.86 936.6,644.66 1155.31,644.66 1160,639.98 Q3.8@1160,613.27
  Bottom Layer w10: v1(515,460) 515.5,459.5 562.78,459.5 R2.2
NetR2_1: R2.1 U1.3 | length 53.9
  Bottom Layer w8: R2.1 602.56,455.16 U1.3
NetR3_1: R3.1 U1.4 | length 61
  Bottom Layer w8: R3.1 598.78,488.94 613.87,488.94 627.97,474.84 U1.4
NetR5_1: R5.1 U1.5 | length 78.2
  Bottom Layer w8: R5.1 607.48,537.2 610.95,537.2 622.56,525.6 622.56,515.44 643.47,494.53 U1.5
NetR9_2: R9.2 U1.19 | length 18.2
  Bottom Layer w10: 777.03,372 777.03,357.97 R9.2
NetR11_2: R11.2 U1.18 | length 58.5
  Bottom Layer w8: U1.18 833.46,415.79 853.27,395.98 R11.2
NetR12_2: R12.2 U1.16 | length 56
  Bottom Layer w8: U1.16 836.89,455.16 840.58,458.84 843.09,458.84 853.27,469.02 R12.2
NetR14_2: R14.2 U1.10 | length 126.4
  Bottom Layer w8: R14.2 703.28,646.27 717.28,632.27 ; 717,632.27 717.28,632.27 ; U1.10 737.03,541.81 737.03,571.32 722.14,586.2 722.14,627.41 717.28,632.27
NetR15_2: R15.2 U1.14 | length 223.2
  Bottom Layer w8: U1.14 837.88,494.53 838.2,494.84 926.16,494.84 973.5,447.5 R15.2
NetR16_1: R16.1 R17.2 U2.14 | length 182.4
  Top Layer w8: R16.1 1367,283.63 1376.96,293.59 1386.12,293.59 1415.55,323.02 R17.2 1421.45,323.02 1431.22,332.78 1431.22,343.06 1463.66,375.5 U2.14
NetR20_2: R20.2 U2.2 | length 60.5
  Top Layer w8: U2.2 1528.68,451.84 1587.44,451.84 R20.2
NetR21_2: R21.2 U3.5 | length 132.7
  Top Layer w8: U3.5 878,529.3 901.35,505.96 R21.2
NetR23_1: R23.1 U1.8 U3.2 | length 313
  Top Layer w10: v1(721,503) 753.75,470.25 U3.2 828.75,470.25 840.86,458.14 840.86,429.36 810.94,399.45 R23.1
  Bottom Layer w7: U1.8 697.97,519.07 706.54,510.5 709.44,510.5 716.94,503 v1(721,503)
NetR25_1: R25.1 U1.9 U3.4 | length 444.5
  Top Layer w8: v1@700,585 733.67,551.33 733.67,527.8 751.67,509.8 788.74,509.8 U3.4 849.38,509.62 871.39,487.61 871.39,359.61 896,335 902,335
  Bottom Layer w8: v1(699,584) 699,582.47 717.66,563.82 U1.9
NetU1_7: U1.7 U3.1 | length 168.2
  Top Layer w10: v1(689.5,456.61) 693.56,456.61 710.89,439.28 747.28,439.28 757,449
  Bottom Layer w8: U1.7 684.13,535.66 684.13,469.8 686.25,467.68 686.25,459.86 v1(689.5,456.61)
pads on no net: K1.06 K1.07 K1.08 Q1.3 Q1.4 Q1.5 Q1.6 Q1.8 Q1.D1 Q1.D2 Q2.3 Q2.4 Q2.5 Q2.6 Q2.8 Q2.D1 Q2.D2 Q3.3 Q3.4 Q3.5 Q3.6 Q3.D1 Q3.D2 U2.1 U2.9 U2.10 U2.16 U2.18 U2.19 U2.20 U2.21 U3.3 U3.6 U3.7 U3.8 U3.9 U3.10 U3.11 U3.12 U3.15 U3.16 U3.17 U3.20 U3.21 U3.22 U3.23 U3.24 U3.25 U3.26 U3.27 U3.28 U3.29 U3.30 U3.35 U3.36 U3.37 U3.38 U3.39 U3.40 U3.41 U3.44 U3.45 U3.47

## Polygon pours and split planes (outlines as drawn)
GND on Bottom Layer "GND_L04_P000" (solid, pour order 0): 210,910 1680,910 1680,50 210,50
GND on Layer 2 "GND_L03_P001" (solid, pour order 1): 208.37,924.58 212.96,920 1680,920 1680,55 210.05,55
GND on Top Layer "GND_L01_P003" (solid, pour order 3): 210,910 1680,910 1680,80 1655,55 210,55
GND on Layer 1 "GND_L02_P002" (solid, pour order 2): 210,910 1660,910 1670,900 1670,55 235,55 210,80

## Silkscreen, mask and mechanical layers (free items; w line width, h text height)
Mechanical 1:
  the board outline again, w19.68
Mechanical 3:
  lines w10: 199.97,-25 200.03,-45 ; 259.93,-14.8 200,-35 ; 260.07,-54.8 200,-35 ; 709.07,-33.29 200,-35 ; 1180.93,-31.71 1690,-30 ; 1629.93,-10.2 1690,-30 ; 1630.07,-50.2 1690,-30 ; 1689.97,-20 1690.03,-40 ; 1740,120 1760,60 ; 1740,865 1760,925 ; 1750,60 1770,60 ; 1750,925 1770,925 ; 1760,396.53 1760,60 ; 1760,588.47 1760,925 ; 1780,120 1760,60 ; 1780,865 1760,925
  lines w19.68: 200,-100 200,55 ; 1685,925 1835,925 ; 1690,-95 1690,60 1830,60
  text "865" at 1795.99,406.53 h60 r90
  text "1490.008" at 719.19,-69.25 h60 r0.19

## Text inside footprints (layer, text, board x,y; h text height)
U1: Bottom Overlay "*" at 597.5,430.94 h50 r180; Bottom Assembly "*" at 654.5,430.94 h50 r180
U2: Top Overlay "*" at 1681,353 h50 r180; Top Assembly "*" at 1525,432.13 h50 r180
U3: Top Overlay "*" at 856.92,450.72 h50 r180; Top Assembly "*" at 755.92,465.72 h50 r180